# Altium PCB MyPCB1.PcbDoc
Units mm, origin at the board's own origin, x right, y up, seen from the top; angles counter-clockwise.
Board outline 134 x 67 mm, 2 copper layers (Top Layer, Bottom Layer), stack 1.535 mm thick; 50 components, 66 nets, 239 pads, 202 vias.
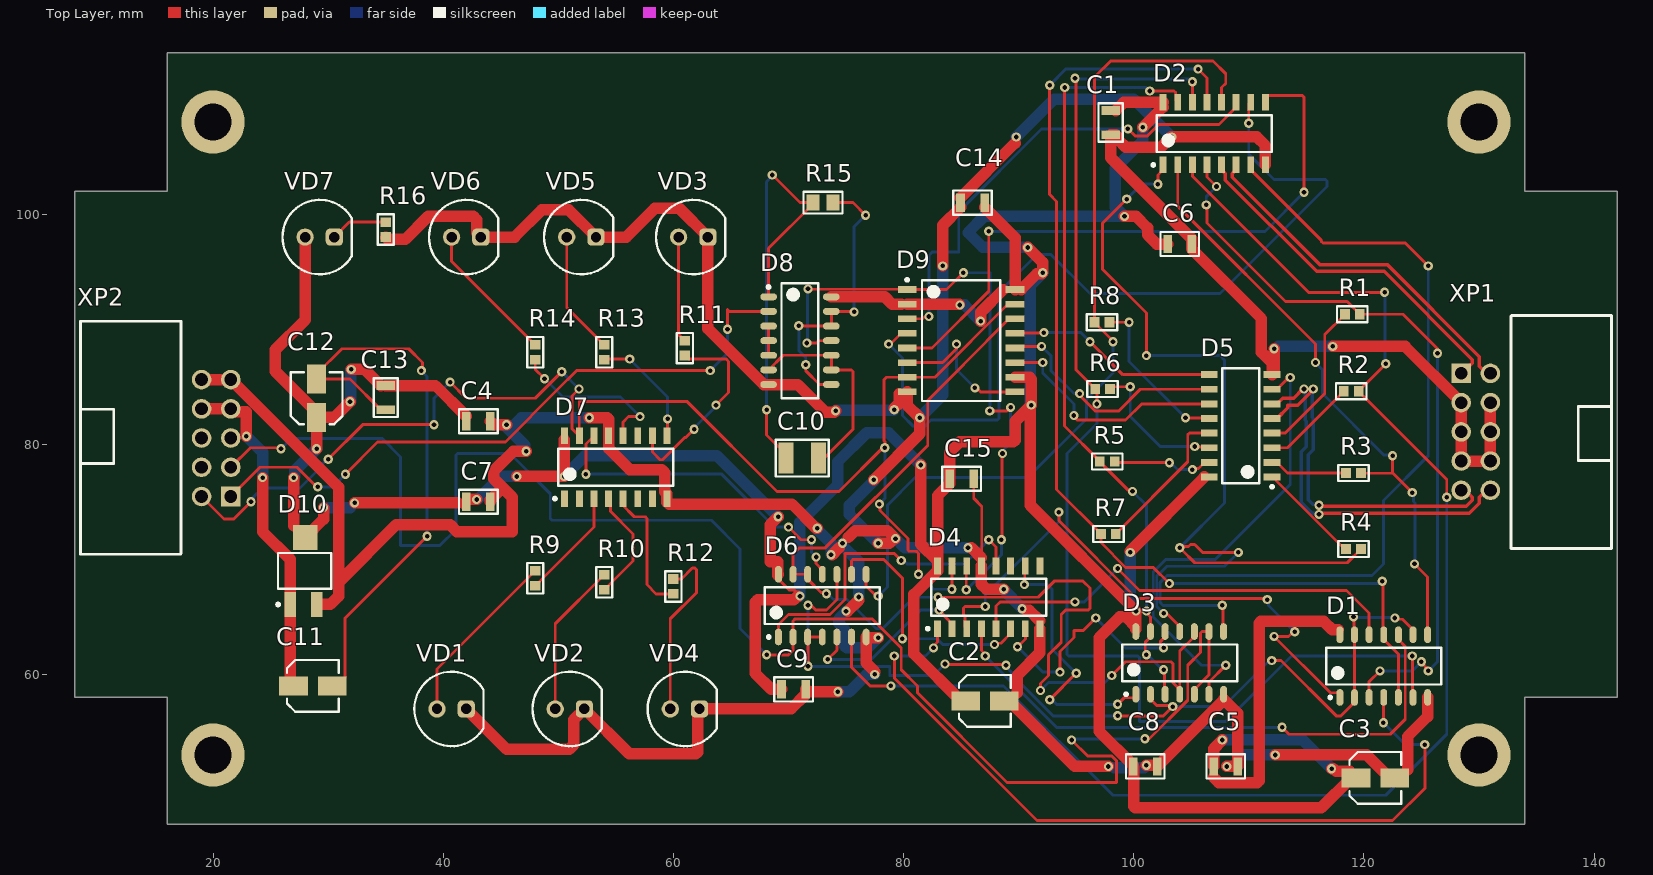
[diagram p0: Top Layer view]
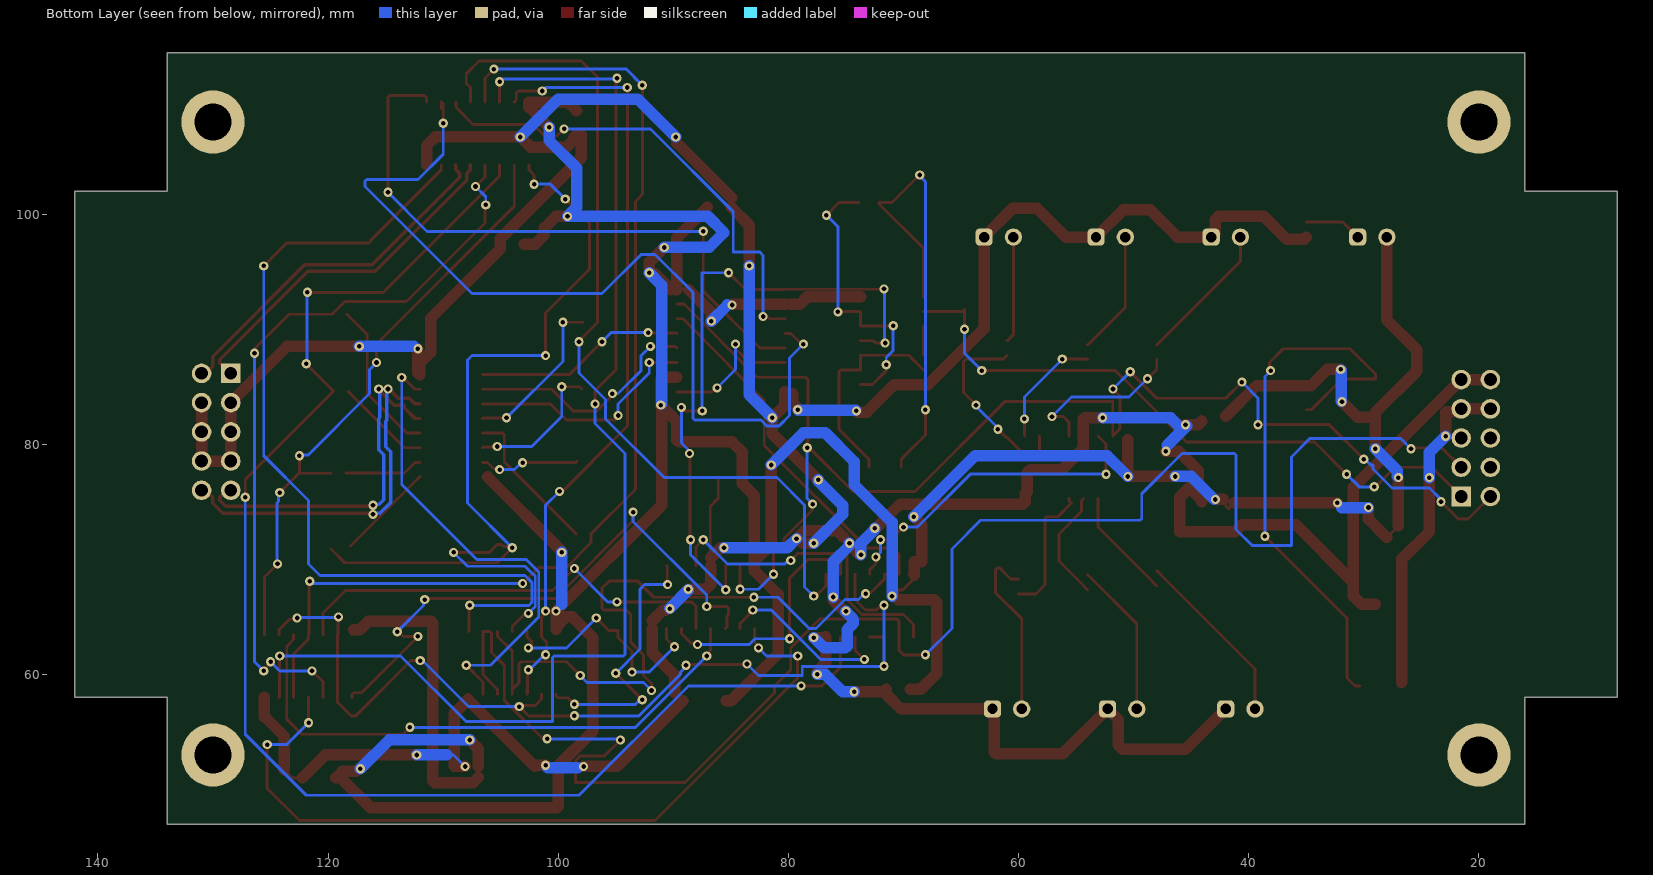
[diagram p1: Bottom Layer view, seen from below]
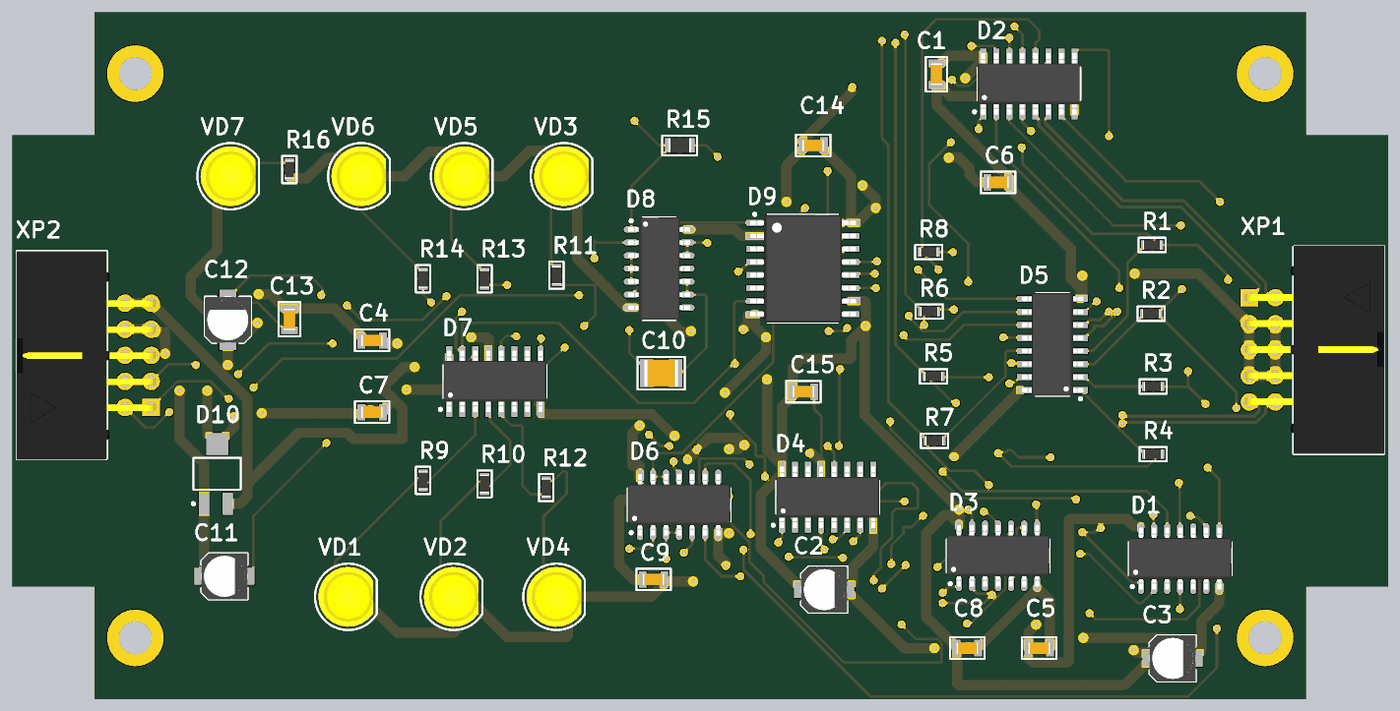
[diagram p2: 3D render of the assembled board from above, using the file's embedded part models]

## Layer stack, top to bottom
Top Solder: solder mask 0.0102, Solder Resist, Dk 3.5
Top Layer: signal copper 0.018
Dielectric 1: core 1.4986, Core-043, Dk 4.3
Bottom Layer: signal copper 0.018
Bottom Solder: solder mask 0.0102, Solder Resist, Dk 3.5

## Board outline
16,47 134,47 134,58 142,58 142,102 134,102 134,114 16,114 16,102 8,102 8,58 16,58

## Design rules (kind name [scope] priority, off if disabled: settings)
Clearance [InNet('No Net')] p1: gap=0.2 ignorepadtopadclearanceinfootprint=FALSE
DiffPairsRouting [All] p1: maxlimit=0.4 minlimit=0.2 mostfreqgap=0.3 toplayer_minwidth=0.2 toplayer_maxwidth=0.381 toplayer_prefwidth=0.3 bottomlayer_minwidth=0.2 bottomlayer_maxwidth=0.381 bottomlayer_prefwidth=0.3 maxuncoupledlength=12.7
PolygonConnect [All] p1: connectstyle=Relief reliefconductorwidth=0.254 reliefentries=4 polygonreliefangle="90 Angle" airgapwidth=0.254
RoutingVias [All] p1: holewidth=0.4 width=0.8 viastyle="Through Hole" minholewidth=0.3 minwidth=0.6 maxholewidth=0.9 maxwidth=1.27
SolderMaskExpansion [All] p1: expansion=0.102
Width [All] p1: maxlimit=1 minlimit=0.2 preferedwidth=0.25
29 further rules are at their usual default settings.

## Classes and differential pairs
net class S[0..5]: S0 S1 S2 S3 S4 S5
net class ABC[0..7]: ABC0 ABC1 ABC2 ABC3 ABC4 ABC5 ABC6 ABC7
component class ivt33_kuznecov_list2_9var: C10 C11 C12 C13 C14 C15 D8 D9 D10 R15 R16 VD7 XP2
component class ivt33_kuznecov_list1_9var: C1 C2 C3 C4 C5 C6 C7 C8 C9 D1 D2 D5 D7 R1 R2 R3 R4 R5 R6 R7 R8 R9 R10 R11 R12 R13 R14 VD1 VD2 VD3 VD4 VD5 VD6 XP1
differential pair Out2: +Out2_P -Out2_N
differential pair Out1: +Out1_P -Out1_N

## Components (designator, comment, footprint, x,y, rotation, side; value= is the part's Value field where it differs from the comment)
C1 "" 0805_N 98,107.95 r90 top
C2 "*" CA010M0010REB-0405 87.075,57.7 r0 top
C3 "*" CA010M0010REB-0405 121,51 r0 top
C4 "" 0805_N 43.05,82 r180 top
C5 "" 0805_N 108,52 r0 top
C6 "" 0805_N 104,97.4 r180 top
C7 "" 0805_N 43.05,75 r180 top
C8 "" 0805_N 101,52 r0 top
C9 "" 0805_N 70.45,58.7 r180 top
C10 "1210" K10-79_3.2_2.5(1210) 71.2,78.8 r0 top
C11 "*" CA010M0010REB-0405 28.675,59 r0 top
C12 "*" CA010M0010REB-0405 29,84 r90 top
C13 "" 0805_N 35,84.05 r90 top
C14 "" 0805_N 86,101 r0 top
C15 "" 0805_N 85.05,77 r180 top
D1 "74AC00SC" SO14-N 121.73,60.725 r90 top
D2 "SOIC-16" SO16-N 107,107 r90 top
D3 "74AC00SC" SO14-N 104,61 r90 top
D4 "SOIC-16" SO16-N 87.4,66.7 r90 top
D5 "SOIC-16" SO16-N 109.3,81.6 r180 top
D6 "74AC00SC" SO14-N 72.94,65.975 r90 top
D7 "SOIC-16" SO16-N 55,78 r90 top
D8 "74AC00SC" SO14-N 71,89 r0 top
D9 "MC14520BDWG \"Motorola\"" SOIC-16W-N 85,89 r0 top
D10 "LM1117DTX" LM1117DTX 29,69 r90 top
R1 "Р1-12-0,1 * 5%-M-\"A\" АЛЯР.434110.005 ТУ" RES_0603_1608_N 119,91.3 r180 top
R2 "Р1-12-0,1 * 5%-M-\"A\" АЛЯР.434110.005 ТУ" RES_0603_1608_N 118.9,84.6 r180 top
R3 "Р1-12-0,1 * 5%-M-\"A\" АЛЯР.434110.005 ТУ" RES_0603_1608_N 119.1,77.5 r180 top
R4 "Р1-12-0,1 * 5%-M-\"A\" АЛЯР.434110.005 ТУ" RES_0603_1608_N 119.1,70.9 r180 top
R5 "Р1-12-0,1 * 5%-M-\"A\" АЛЯР.434110.005 ТУ" RES_0603_1608_N 97.7,78.5 r0 top
R6 "Р1-12-0,1 * 5%-M-\"A\" АЛЯР.434110.005 ТУ" RES_0603_1608_N 97.3,84.8 r0 top
R7 "Р1-12-0,1 * 5%-M-\"A\" АЛЯР.434110.005 ТУ" RES_0603_1608_N 97.8,72.2 r0 top
R8 "Р1-12-0,1 * 5%-M-\"A\" АЛЯР.434110.005 ТУ" RES_0603_1608_N 97.25,90.6 r0 top
R9 "Р1-12-0,1 * 5%-M-\"A\" АЛЯР.434110.005 ТУ" RES_0603_1608_N 48,68.35 r90 top
R10 "Р1-12-0,1 * 5%-M-\"A\" АЛЯР.434110.005 ТУ" RES_0603_1608_N 54,68 r90 top
R11 "Р1-12-0,1 * 5%-M-\"A\" АЛЯР.434110.005 ТУ" RES_0603_1608_N 61,88.35 r90 top
R12 "Р1-12-0,1 * 5%-M-\"A\" АЛЯР.434110.005 ТУ" RES_0603_1608_N 60,67.65 r90 top
R13 "Р1-12-0,1 * 5%-M-\"A\" АЛЯР.434110.005 ТУ" RES_0603_1608_N 54,88 r90 top
R14 "Р1-12-0,1 * 5%-M-\"A\" АЛЯР.434110.005 ТУ" RES_0603_1608_N 48,88 r90 top
R15 "0805" RES_0805_2012_N 73,101 r0 top
R16 "Р1-12-0,1 * 5%-M-\"A\" АЛЯР.434110.005 ТУ" RES_0603_1608_N 35,98.65 r90 top
VD1 "*" LED_5mm 40.73,57 r0 top
VD2 "*" LED_5mm 51,57 r0 top
VD3 "*" LED_5mm 61.73,98 r0 top
VD4 "*" LED_5mm 61,57 r0 top
VD5 "*" LED_5mm 52,98 r0 top
VD6 "*" LED_5mm 42,98 r0 top
VD7 "*" LED_5mm 29.27,98 r0 top
XP1 "TE_1-1634689-0" BH-10R 129.73,81.08 r180 top
XP2 "TE_1-1634689-0" BH-10R 20.27,80.54 r0 top

## Footprints (in the part's own frame and the unit in brackets; to place one, negate y for a bottom-side part, rotate by r counter-clockwise, add the part's x,y. Pads: shape width x height; smd on the part's side, far side on the other; paste and mask are expansions set on the pad)
0805_N [mm] "Резистор, конденсатор"
  rect 0.75x1.6 smd: 1(-1.05,0) 2(1.05,0)
  silkscreen extent -1.68,-1.05 1.68,1.05, body extent -1.05,-0.58 1.05,0.58, height 1
BH-10R [mm] "Разъем угловой 2х5х2,54 типа ВН"
  rect 1.7x1.7 hole 1.1: 1(1.27,-5.08)
  round 1.7 hole 1.1: 2(-1.27,-5.08) 3(1.27,-2.54) 4(-1.27,-2.54) 5(1.27,0) 6(-1.27,0) 7(1.27,2.54) 8(-1.27,2.54) 9(1.27,5.08) 10(-1.27,5.08)
  silkscreen extent -11.8,-10.1 -3.05,10.15, body extent -11.85,-10.2 1.65,10.15, height 9.13
CA010M0010REB-0405 [mm] "Aluminum Electrolytic Capacitor, Body 4,30x4,30x6,30mm, IPC Medium Density"
  rect 2.5x1.65 smd: +(-1.675,0) -(1.675,0)
  silkscreen extent -2.25,-2.25 2.25,2.25, body extent -2.3,-2.25 2.3,2.25, height 6.3
K10-79_3.2_2.5(1210) [mm]
  rect 1.3x2.7 smd: 1(-1.4,0) 2(1.4,0)
  silkscreen extent -2.3,-1.6 2.3,1.6, body extent -1.65,-1.3 1.65,1.3, height 1.75
LED_5mm [mm]
  round 1.5 hole 0.9: A(-1.27,0)
  rrect50% 1.5x1.5 hole 0.9: C(1.27,0)
  silkscreen extent -3.24,-3.24 2.78,3.24, body extent -2.92,-2.92 2.41,2.92, height 10.71
LM1117DTX [mm] "SOT223, 4-Leads, Body 6,50x7,00mm (avg), Pitch 2,30mm, IPC Medium Density"
  rect 2.15x1 smd: 1(-2.925,2.3) 3(-2.925,0)
  rect 2.15x2.15 smd: 4(2.9,1)
  silkscreen extent -3.05,-1.27 1.55,3.47, body extent -1.85,-1.27 1.85,3.35, height 1.8
RES_0603_1608_N [mm] "Chip Resistor, 2-Leads, Body 1,60x0,80mm, IPC Medium Density"
  rect 0.85x0.9 smd: 1(-0.65,0) 2(0.65,0)
  silkscreen extent -1.33,-0.7 1.33,0.7, body extent -0.87,-0.45 0.87,0.45, height 0.55
RES_0805_2012_N [mm] "Rezistor 0805"
  rect 1.15x1.4 smd: 1(-0.875,0) 2(0.875,0)
  silkscreen extent -1.7,-0.95 1.7,0.95, body extent -1.1,-0.7 1.1,0.7, height 0.6
SO14-N [mm]
  oval 1.45x0.6 smd: 1(-2.725,3.81) 2(-2.725,2.54) 3(-2.725,1.27) 4(-2.725,0) 5(-2.725,-1.27) 6(-2.725,-2.54) 7(-2.725,-3.81) 8(2.725,-3.81) 9(2.725,-2.54) 10(2.725,-1.27) 11(2.725,0) 12(2.725,1.27) 13(2.725,2.54) 14(2.725,3.81)
  silkscreen extent -2.85,-5 1.6,5, body extent -3,-5 3,5, height 1.45
SO16-N [mm] "SOIC, 16-Leads, Body 9,90x3,90mm, Pitch 1,27mm, IPC Medium Density"
  rect 1.45x0.6 smd: 1(-2.725,4.445) 2(-2.725,3.175) 3(-2.725,1.905) 4(-2.725,0.635) 5(-2.725,-0.635) 6(-2.725,-1.905) 7(-2.725,-3.175) 8(-2.725,-4.445) 9(2.725,-4.445) 10(2.725,-3.175) 11(2.725,-1.905) 12(2.725,-0.635) 13(2.725,0.635) 14(2.725,1.905) 15(2.725,3.175) 16(2.725,4.445)
  silkscreen extent -2.85,-5 1.6,5.42, body extent -3,-5 3,5, height 1.45
SOIC-16W-N [mm] "SOIC, 16-Leads, Body 10,30x7,50mm, Pitch 1,27mm, IPC Medium Density"
  rect 1.62x0.58 smd: 1(-4.69,4.445) 2(-4.69,3.175) 3(-4.69,1.905) 4(-4.69,0.635) 5(-4.69,-0.635) 6(-4.69,-1.905) 7(-4.69,-3.175) 8(-4.69,-4.445) 9(4.69,-4.445) 10(4.69,-3.175) 11(4.69,-1.905) 12(4.69,-0.635) 13(4.69,0.635) 14(4.69,1.905) 15(4.69,3.175) 16(4.69,4.445)
  silkscreen extent -4.81,-5.25 3.4,5.41, body extent -5.15,-5.25 5.15,5.25, height 2.65

## Part data
C1 C4 C5 C6 C7 C8 C9 C13 C14 C15: library part К10-79_0805_Н90, "Чип конденсатор 0805 Н90 ряд Е6", Case=0805, Manufacturer="ООО \"Кулон\"", Tolerance=+80%-20%, BOM="К10-79-*-B-*+80%-20%-Н90 АЖЯР.673511.004 ТУ", Created_by=Желобаев, Issue_date=19_12_2018, Name=К10-79, Name2="Конденсатор К10-79", TKE=Н90, TU="АЖЯР.673511.004 ТУ", Type=K10-79, Version=0, Weight=0.05
C2 C3 C11 C12: library part CA010M0010REB-0405, "Электролитический SND"
C10: library part К10-79_1210_Н30, "Чип конденсатор 1210 Н30 ряд Е6", Manufacturer="ООО \"Кулон\"", Tolerance=±20%, BOM="Конденсатор К10-79-*-B-*±20%-Н30 АЖЯР.673511.004 ТУ", Datum=19_12_2018, HelpURL=\\papa\Info\Altium_Library\Даташиты_и_ТУ\Конденсаторы_отечественные\К10-79_АЖЯР_673511_004ТУ.pdf, Hight=1.75, LibraryEngeneer=Желобаев, LiveStatus=производится, Name="Конденсатор К10-79", Packing=катушка, Permit MPSU=разрешен, Reliability=0.000005, Size=1210, TKE=Н30, TU="АЖЯР.673511.004 ТУ", Type=K10-79, Version=00, Weight=0.2
D1 D3 D6 D8: "4 элемента 2И-НЕ TTL SOIC-14", Case=SOIC-14, Manufacturer="ON Semiconductor", Power_Voltage="4.5 - 5.5 V", BOM="74AC00SC \"ON Semiconductor\"", Created_by=Желобаев, Issue_date=10.04.2019, Name=74AC00SC, Name2="Микросхема 74AC00SC", Version=0
D2 D5: library part 74HCT151D, "мультиплексор 8 канальный TTL", Manufacturer="NXP Semiconductors", Power_Voltage="4.5 -5.5 V", BOM="74HCT151D \"NXP Semiconductors\"", Case=SOIC-16, Created_by=Желобаев, Issue_date=05.04.2019, Name=74HCT151D, Name2="Микросхема 74HCT151D", Version=0
D4 D7: library part HCF4017BM1, "Декадный счетчик c 10 декодированными выходами", Manufacturer=STMicroelectronics, Power_Voltage="-0.5 -22 V", BOM="HCF4017BM1 \"STMicroelectronics\"", Case=SOIC-16, Created_by=Желобаев, Issue_date=05.04.2019, Name=HCF4017BM1, Name2="Микросхема HCF4017BM1", Version=0
D9: library part MC14520BDWG, "Два двоичных счетчика", Case=SOIC-16, Manufacturer=Motorola, BOM="MC14520BDWG \"Motorola\"", Created_by=Желобаев, Issue_date=6.01.2019, Name=MC14520BDWG, Name2="Микросхема MC14520BDWG", Version=0
R1 R2 R3 R4 R5 R6 R7 R8 R9 R10 R11 R12 R13 R14 R16: library part Р1-12-0,1-5%, "Резистор от 0,75 Ом до 10 МОм", Case=0603, Manufacturer="ОАО \"НПО \"Эркон\"", Tolerance=5%, Voltage=50, BOM="Р1-12-0,1 * 5%-M-\"A\" АЛЯР.434110.005 ТУ", Created_by=Желобаев, Issue_date=10.04.2019, Name=Р1-12-0,1, Name2="Резистор Р1-12-0,1", Size=0603, TKR=M, TU="АЛЯР.434110.005 ТУ", Type="Р1-12-0,1±5%-М-\"А\"", Version=00, Weight=0,005
R15: library part Р1-12-0,125-5%, "Резистор от 0,75 Ом до 2 МОм", Manufacturer="ОАО \"НПО \"Эркон\"", Tolerance=5%, Voltage=150, BOM="Р1-12-0,125 * 5%-M-\"A\" АЛЯР.434110.005 ТУ", Case=0805, Created_by=Желобаев, Issue_date=05_12_2018, Name=Р1-12-0,125, Name2="Резистор Р1-12-0,125", Size=0805, TKR=M, TU="АЛЯР.434110.005 ТУ", Type="Р1-12-0,125±5%-М-\"А\"", Version=00, Weight=0,01
VD1 VD2 VD3 VD4 VD5 VD6 VD7: library part 521-9466, "Светодиод,5мм,жёлтый", Manufacture=Dialight, BOM="521-9466 \"Dialight\"", Name=521-9466
XP1 XP2: "Вилка типа BH-10R угловая правая двухрядная 2х5х2.54", Case=BH-10R, Manufacturer="TE Connectivity", BOM="TE_1-1634689-0 \"TE Connectivity\"", Created_by=Желобаев, Issue_date=13.05.2019, Name=TE_1-1634689-0, Name2="Вилка угловая TE_1-1634689-0", Version=0

## Free pads (board coordinates)
  round 5.5 hole 3.2: M1(20,108) M2(130,108) M3(130,53) M4(20,53)

## Via types
v1: diameter 0.8, hole 0.4, Top Layer to Bottom Layer, 202 vias

## Nets (pads, with @x,y where several pads share a name; then routed paths per layer and width w, separated by ;. In a path a pad name is that pad's centre, name@x,y a point inside that pad or via, vN(x,y) a via of type N, cw(c..) or ccw(c..) an arc to the next point about the centre after c; other vN are vias at no path point)
+5V: C1.2 C2.+ C3.+ C4.2 C5.1 C6.2 C7.2 C8.1 C9.2 C12.+ C13.2 C14.2 C15.2 D1.14 D2.16 D3.14 D4.16 D5.16 D6.14 D7.16 D8.14 D9.2 D9.10 D9.16 D10.4 VD7.A | length 398
  Top Layer w0.25: D10.4@27,72.9 D10.4 ; C13.2@34.575,85.1 C13.2 ; 41.25,74.9 41.75,74.4 42,74.65 C7.2 C7.2@42.2,75.2 ; C4.2 C4.2@42,82.425 ; D6.14 69.13,68.275 70.057,67.348 70.452,67.348 v1(71,66.8) ; D9.2@79.79,92.175 D9.2 ; C14.2@87.05,100.575 C14.2 ; 88.679,93.445 D9.16 D9.16@90.21,93.445 ; v1@91.995,94.795 v1(92.1,94.9) v1@92.076,94.924 ; C1.2 C1.2@98.425,109 ; v1(99.7,70.6) v1@99.7,70.705 ; D2.16@102.555,109.3 D2.16 ; D5.16@106.15,77.155 D5.16 ; 106.95,51.05 C5.1 ; 110.754,50.6 110.9,50.746 ; 110.9,64.454 111.046,64.6 ; D1.14@117.758,63.878 117.92,63.717 D1.14
  Top Layer w1: D10.4@27,72.9 v1(27,77.1) ; D10.4 29.6,73.5 v1(29.6,74.5) ; VD7.A 28,90.8 25.4,88.2 25.4,86.35 29,82.75 C12.+ ; v1(29,79.6) C12.+ ; v1(31.9,83.7) 30.525,82.325 C12.+ ; v1(32,86.5) 33.175,86.5 C13.2@34.575,85.1 ; v1(32.3,74.9) 41.25,74.9 ; C13.2 39.325,85.1 C4.2@42,82.425 ; C7.2@42.2,75.2 v1(42.9,75.2) ; v1(46.4,77.2) v1(50.5,77.2) D7.16@50.5,80.38 ; v1(69.1,73.7) 68.4,73 68.4,69.8 69.063,69.8 69.063,68.633 D6.14 ; C9.2 68.5,58.7 67.1,60.1 67.1,66.254 67.323,66.477 70.477,66.477 v1@70.8,66.8 ; D8.14 78.365,92.81 79,92.175 D9.2@79.79,92.175 ; D9.2 v1@84.825,92.175 ; v1(81.5,78.2) 81.5,71.305 D4.16@82.955,69.85 ; C2.+ 84.975,57.7 80.9,61.775 80.9,66.945 82.955,69 D4.16 D4.16@82.955,69.85 ; v1(86.7,90.7) 86.7,91.466 88.679,93.445 ; C14.2@87.05,100.575 89.69,97.935 D9.16 ; D9.10 89.702,85.813 90.954,85.813 91.1,85.666 v1(91.1,83.4) v1@91,83.3 ; D9.16@90.21,93.445 91.56,94.795 v1@91.995,94.795 ; v1(90.8,97.1) 92.076,95.824 v1@92.076,94.924 ; C1.2@98.425,109 99.15,109.725 D2.16 ; v1(99.2,99.8) 100.2,99.8 101.203,98.797 101.203,98.197 102,97.4 C6.2 ; v1@99.7,70.705 D5.16@106.15,77.155 ; D3.14@100.19,64.15 99.344,64.996 98.796,64.996 97,63.2 97,55.046 99.95,52.096 C8.1 100,51.95 100,48.546 100.146,48.4 116.3,48.4 118.9,51 C3.+ 118.761,51.564 117.585,51.564 117.349,51.8 v1(117.2,51.8) ; D3.14@100.195,63.942 100.195,65.495 v1(100.2,65.5) 91,74.7 v1@91,83.3 ; v1(100.8,107.545) D2.16@102.555,109.3 ; 106.95,51.05 107.4,50.6 110.754,50.6 ; C5.1 106.95,53.55 v1(107.7,54.3) ; 110.9,50.746 110.9,64.454 ; 111.046,64.6 116.523,64.6 117.245,63.878 D1.14@117.758,63.878 ; D4.16@82.955,69.85 82.955,75.53 84,76.575 C15.2 84,79.3 84.9,80.2 89.554,80.2 89.7,80.346 89.7,82 v1@91,83.3
  Bottom Layer w0.25: v1(27,77.1) v1@27.105,77.205 ; 31.9,74.5 v1(32.3,74.9) ; v1(31.9,83.7) v1@31.95,83.75 ; v1@31.95,86.45 v1(32,86.5) ; v1(42.9,75.2) v1@43,75.2 ; v1@91,83.5 v1(91.1,83.4) ; 99.7,66.096 100.2,65.596 v1(100.2,65.5)
  Bottom Layer w1: v1@27.105,77.205 27.105,77.705 v1(29,79.6) ; v1(29.6,74.5) 31.9,74.5 ; v1@31.95,83.75 v1@31.95,86.45 ; v1@43,75.2 45,77.2 v1(46.4,77.2) ; v1(50.5,77.2) 52.312,79.012 63.788,79.012 v1(69.1,73.7) ; v1(71,66.8) 71,73.2 74.3,76.5 74.3,78.5 76.8,81 78.7,81 v1(81.5,78.2) ; v1@85.3,92.1 v1(86.7,90.7) ; v1(90.8,97.1) 86.9,97.1 85.604,98.396 87.007,99.8 v1(99.2,99.8) 98.4,100.6 98.4,104 100.8,106.4 v1(100.8,107.545) ; v1@91,83.5 91,93.8 v1(92.1,94.9) ; 99.7,66.096 v1(99.7,70.6) ; v1(107.7,54.3) 114.7,54.3 v1(117.2,51.8)
  other v1: 84.9,92.1
+9V: C11.+ D10.1 XP2.7 XP2.8 | length 29.5
  Top Layer w0.25: XP2.7 XP2.7@21.817,82.803 ; C11.+@26.7,59.3 C11.+
  Top Layer w1: XP2.8 XP2.7 ; XP2.7@21.817,82.803 22.897,82.803 22.9,82.8 v1(22.9,80.7) ; v1(24.3,77.1) 24.3,72.4 26.7,70 D10.1 C11.+@26.7,59.3
  Bottom Layer w1: v1(22.9,80.7) 24.3,79.3 v1(24.3,77.1)
ABC0: D1.3 D2.4 R1.1 | length 66.4
  Top Layer w0.25: v1(106.3,100.8) 106.365,100.735 106.365,99.235 113.2,92.4 118.55,92.4 119.325,91.625 119.35,91.625 119.65,91.325 R1.1 123.4,91.3 126.4,88.3 v1(126.4,87.9) ; D2.4 106.365,103.235 v1(107.2,102.4) ; D1.3 120.46,59.36 v1(121.4,60.3) ; v1(125,61.1) 125,61 125.6,60.4 v1(125.6,60.3)
  Bottom Layer w0.25: v1(106.3,100.8) 106.3,101.5 v1(107.2,102.4) ; v1(121.4,60.3) 124.2,60.3 v1(125,61.1) ; v1(125.6,60.3) 126.4,61.1 v1(126.4,87.9)
ABC1: D2.3 D6.6 R2.1 | length 125.6
  Top Layer w0.25: D6.6 75.48,60.62 77.1,59 v1(78.9,59) ; D2.3 105.095,103.305 115.2,93.2 v1(121.8,93.2) ; v1(121.9,87) 121.9,86.975 119.55,84.625 R2.1 119.55,84.575 127.2,76.925 v1(127.2,75.4)
  Bottom Layer w0.25: v1(78.9,59) 88.7,59 98.2,49.5 121.9,49.5 127.2,54.8 v1(127.2,75.4) ; v1(121.8,93.2) 121.85,93.15 121.85,87.05 v1(121.9,87)
ABC2: D1.8 D2.2 R3.1 | length 53
  Top Layer w0.25: D2.2 103.825,100.675 115.8,88.7 v1(115.8,87.1) ; R3.1 119.77,77.48 122.52,77.48 v1(124.2,75.8) ; 122.5,77.505 v1(122.5,79) ; v1(124.4,69.6) 125.54,68.46 D1.8
  Bottom Layer w0.25: v1(115.8,87.1) 115.8,87.079 116.4,86.479 116.4,84.4 121.725,79.075 122.425,79.075 v1(122.5,79) ; v1(124.2,75.8) 124.305,75.695 124.305,75.045 124.45,74.9 124.45,69.65 v1(124.4,69.6)
ABC3: D2.1 D3.11 R4.1 | length 82.1
  Top Layer w0.25: v1(99.4,101.3) 97.3,99.2 97.3,95.2 101.1,91.4 v1(101.1,87.7) ; v1(102.1,102.6) 102.1,103.395 102.555,103.85 D2.1 ; v1(102.6,65.3) 102.705,65.195 102.955,65.195 104,64.15 D3.11 ; v1(109.1,70.6) 106,70.6 105.3,71.3 104.949,71.3 104.754,71.105 104.105,71.105 v1(104,71) 104.156,70.844 105.3,69.7 118.55,69.7 R4.1
  Bottom Layer w0.25: v1(99.4,101.3) 100.7,102.6 v1(102.1,102.6) ; v1(101.1,87.7) 107.5,87.7 107.9,87.3 107.9,74.9 v1(104,71) ; v1(102.6,65.3) 102,65.9 102,68.554 102.146,68.7 102.2,68.7 102.9,69.4 107.9,69.4 v1(109.1,70.6)
ABC4: D2.15 D3.3 D3.13 R5.1 | length 68.2
  Top Layer w0.25: v1(94,111) 94,81.575 97.05,78.525 R5.1 97.05,78.475 99.52,76.005 99.795,76.005 v1(99.9,75.9) ; v1(101.1,61.7) 101.005,61.795 101.005,62.8 101.46,63.255 D3.13 101.46,64.991 101.1,65.351 v1(101.1,65.5) ; v1(101.4,110.7) 103.5,110.7 103.65,110.55 103.65,109.9 D2.15 ; v1(102.6,60.4) 102.665,60.335 102.665,58.34 D3.3 D3.3@102.73,58.7
  Bottom Layer w0.25: v1(94,111) 101.1,111 v1(101.4,110.7) ; v1(99.9,75.9) 101.1,74.7 v1(101.1,65.5) ; v1(101.1,61.7) 101.2,61.7 102.5,60.4 v1(102.6,60.4)
ABC5: D1.6 D2.14 R6.1 | length 105.7
  Top Layer w0.25: v1(94.9,111.8) 95,111.7 95,86.475 96.65,84.825 R6.1 96.8,84.65 v1(96.8,83.5) ; D2.14 105.097,109.727 v1(105.097,111.497) ; v1(124.2,61.6) 124.235,61.565 124.235,58.035 D1.6
  Bottom Layer w0.25: v1(94.9,111.8) 94.95,111.75 104.845,111.75 v1(105.097,111.497) ; v1(96.8,83.5) 96.8,81.8 94.2,79.2 94.2,61.746 94.346,61.6 100.354,61.6 100.5,61.454 100.5,55.9 108,55.9 113.7,61.6 v1(124.2,61.6)
ABC6: D1.5 D1.11 D2.13 R7.1 | length 94.9
  Top Layer w0.25: v1(92.7,111.2) 92.7,101.7 93.3,101.1 93.3,92.8 93.3,76.075 97.15,72.225 R7.1 97.15,71.45 99.3,69.3 101.7,69.3 v1(103.1,67.9) ; v1(105.6,112.6) 106.365,111.835 D2.13 ; v1(121.6,68.1) 121.665,68.035 121.665,63.515 D1.11 121.73,63.025 123,61.755 D1.5
  Bottom Layer w0.25: v1(92.7,111.2) 94.1,112.6 v1(105.6,112.6) ; v1(103.1,67.9) 121.251,67.9 121.451,68.1 v1(121.6,68.1)
ABC7: D2.12 D6.8 R8.1 | length 77.5
  Top Layer w0.25: D6.8 76.75,67.674 77.624,66.8 v1(77.8,66.8) ; v1(98.2,88.9) 98.2,88.975 96.6,90.575 R8.1 96.6,111.9 98,113.3 106.9,113.3 108,112.2 108,111.358 107.635,110.993 D2.12
  Bottom Layer w0.25: v1(77.8,66.8) 78.6,67.6 78.6,74.7 81,77.1 90.8,77.1 95.9,82.2 95.9,83.9 98.2,86.2 v1(98.2,88.9)
GND: C1.1 C2.- C3.- C4.1 C5.2 C6.1 C7.1 C8.2 C9.1 C14.1 C15.1 D1.7 D2.8 D3.7 D4.8 D4.13 D5.8 D6.7 D7.8 D7.13 D8.7 D9.8 D10.3 R16.1 VD1.C VD2.C VD3.C VD4.C VD5.C VD6.C XP1.3 XP1.4 XP1.5 XP1.6 XP1.7 XP1.8 XP2.9 XP2.10 | length 461
  Top Layer w0.25: C4.1@43.888,82.213 C4.1@44.113,82.438 ; C4.1 44.1,81.75 C4.1@44.35,81.5 ; v1(73.7,70.4) v1@73.8,70.4 ; v1(75,65.5) v1@75.149,65.5 ; 75.203,71.57 75.203,71.903 ; v1@76.1,66.451 v1(76.1,66.726) ; D6.7 D6.7@76.8,63.2 ; v1(77.5,60) v1@77.5,60.249 ; v1@79.151,71.8 v1(79.3,71.8) ; v1(79.2,83) v1@79.2,83.149 ; D9.8@79.625,84.39 79.79,84.555 D9.8 ; C14.1@84.95,100.575 C14.1 C14.1@84.95,101.425 ; v1(85.6,71) v1@85.9,71 ; C15.1 86.1,75.3 86.8,74.6 86.8,69.46 D4.13 D4.13@86.765,70.135 ; C2.- 89.175,57.7 C2.-@89.875,58.4 ; 89.695,106.17 89.695,106.595 v1(89.8,106.7) ; D4.8 D4.8@91.845,64.655 ; C8.2@101.95,52.1 C8.2 ; D3.7@107.648,57.598 107.648,57.783 D3.7@107.81,57.945 ; D3.7@107.81,57.85 D3.7@107.81,57.945 ; D3.7 D3.7@107.81,57.945 ; C3.-@122.25,51 C3.- 123.1,51 C3.-@123.8,51.7
  Top Layer w1: XP2.10 XP2.9 30.9,76.26 30.9,68.1 ; D10.3 30.175,66.075 30.9,66.8 30.9,68.1 ; R16.1 35.2,97.8 36.7,97.8 38.7,99.8 42.6,99.8 42.9,99.5 42.9,98.37 VD6.C 46.2,98 48.581,100.381 50.889,100.381 VD5.C 55.9,98 58.4,100.5 60.5,100.5 VD3.C 63,90.04 67.85,85.19 D8.7 70.81,85.19 73.2,82.8 74,82.8 v1(74.1,82.9) ; VD1.C 45.5,53.5 50.954,53.5 51.343,53.889 51.343,56.073 VD2.C 56.17,53.1 61.954,53.1 62.1,53.246 62.1,56.83 VD4.C 70.225,57 71.5,58.275 C9.1 71.7,58.5 v1(74.3,58.5) ; C7.1 44.1,75.175 45,76.075 45,76.4 ; C4.1 44.4,81.7 v1(45.5,81.7) ; v1(47.2,79.4) 46.1,79.4 44.4,77.7 44.4,77 45,76.4 ; v1(52.7,82.3) 54.254,82.3 54.4,82.154 54.4,80.76 D7.13 54.375,80.715 54.375,79.625 56.2,77.8 59,77.8 59.27,77.53 59.27,75.875 59.445,75.7 D7.8 59.445,74.975 59.62,74.8 70.3,74.8 72.4,72.7 v1(72.5,72.7) ; v1@73.8,70.4 74.4,71 ; v1@75.149,65.5 v1@76.1,66.451 ; 75.203,71.903 75.8,72.5 78.6,72.5 v1(79.3,71.8) ; D6.7 76.75,60.999 v1@77.5,60.249 ; D6.7@76.8,63.2 v1(77.8,63.2) ; v1(77.4,76.9) 81.4,80.9 v1(81.4,82.3) 80.31,83.39 D9.8 ; v1(77.8,71.4) 78.751,71.4 v1@79.151,71.8 ; v1@79.2,83.149 79.625,83.574 D9.8@79.625,84.39 ; v1(83.4,95.5) 83.4,99.025 C14.1@84.95,100.575 ; C14.1@84.95,101.425 89.695,106.17 ; v1@85.9,71 D4.13@86.765,70.135 ; D4.13 86.765,67.835 87.2,67.4 v1(88.7,67.4) ; C2.-@89.175,57.7 94.875,52 v1(97.8,52) ; C2.-@89.875,58.4 89.875,59.903 91.845,61.873 D4.8 ; v1@90.65,65.595 90.905,65.595 D4.8@91.845,64.655 ; v1(101.1,52.1) C8.2@101.95,52.1 ; C8.2 D3.7@107.648,57.598 ; D3.7@107.81,57.85 109.05,56.61 C5.2 v1(108.1,52) ; D2.8 111.445,105.955 110.7,106.7 v1(103.3,106.7) 103.279,106.7 102.379,105.8 99.321,105.8 98.675,106.446 98.675,106.65 98.425,106.9 C1.1 98,104.9 105.05,97.85 C6.1 105.05,96.975 111.1,90.925 111.1,88 112.025,87.075 D5.8 112.2,86.22 v1(112.2,88.3) ; v1(112.3,53) 120.25,53 C3.-@122.25,51 ; v1(117.3,88.5) 123.58,88.5 XP1.3 XP1.5 XP1.7 XP1.8 XP1.6 XP1.4 ; C3.-@123.8,51.7 123.8,54.6 125.54,56.34 D1.7 ; 30.9,68.1 31,68.1 35.9,73 40.6,73 41.196,72.404 46,72.404 46,75.4 45,76.4
  Bottom Layer w0.25: v1(45.5,81.7) 46.2,81.7 ; 47.095,79.905 47.095,79.505 v1(47.2,79.4) ; v1(74.1,82.9) v1@74.15,82.95 ; v1@79.15,82.95 v1(79.2,83) ; v1@88.7,67.35 v1(88.7,67.4) ; v1(90.3,65.7) v1@90.3,65.75 ; v1(97.8,52) 97.9,51.9 98.3,51.9 ; v1@100.9,51.9 v1(101.1,52.1) ; v1(108.1,52) 109.1,53 109.7,53
  Bottom Layer w1: v1@45.4,81.6 47.095,79.905 ; 46.2,81.7 46.8,82.3 v1(52.7,82.3) ; v1(72.5,72.7) 72.5,72.6 73.7,71.4 v1(73.7,70.4) ; v1@74.15,82.95 v1@79.15,82.95 ; v1(74.3,58.5) 75.3,58.5 76.8,60 v1(77.5,60) ; v1(74.7,71.4) 74.7,71.2 76.1,69.8 v1(76.1,66.726) ; v1(75,65.5) 75,65.438 74.395,64.832 74.395,64.695 74.375,64.675 74.375,64.425 74.9,63.9 74.9,62.446 75.046,62.3 76.9,62.3 v1(77.8,63.2) ; v1(77.4,76.9) 77.4,76.8 75.3,74.7 75.3,73.9 v1(77.8,71.4) ; v1(79.3,71.8) 80.1,71 v1(85.6,71) ; v1(81.4,82.3) 83.4,84.3 v1(83.4,95.5) ; v1@88.7,67.35 v1@90.3,65.75 ; v1(89.8,106.7) 93.1,110 100,110 v1(103.3,106.7) ; 98.3,51.9 v1@100.9,51.9 ; 109.7,53 v1(112.3,53) ; 112.549,88.5 v1(117.3,88.5)
NetC10_1: C10.1 D8.1 R15.1 | length 40.8
  Top Layer w0.25: v1(68.1,83) 68.1,80.8 69.6,79.3 70.2,78.7 C10.1@70.2,78 ; D8.1 68.275,97.025 72.125,100.875 R15.1 71,101 v1(68.6,103.4)
  Bottom Layer w0.25: v1(68.1,83) 68.1,102.804 68.6,103.304 v1(68.6,103.4)
NetC10_2: C10.2 D8.6 D8.9 D8.10 | length 18.6
  Top Layer w0.25: D8.6 69.545,87.73 D8.10 D8.9 75.454,86.46 75.6,86.314 75.6,81.3 73,78.7 C10.2@73,78
NetC11_-: C11.- C12.- C13.1 | length 50.2
  Top Layer w0.25: C11.- 30.775,59 31.475,59.7 31.475,64.875 v1(38.6,72) ; C13.1 34.575,83 31.9,85.675 C12.- 29,86.1 31.2,88.3 37,88.3 38.196,87.104 38.196,86.496 v1(38.1,86.4)
  Bottom Layer w0.25: v1(38.1,86.4) 38.6,85.9 v1(38.6,72)
NetD1_2: D1.2 D1.9 D1.13 D3.2 D6.3 D6.4 D6.10 | length 85.7
  Top Layer w0.25: v1(71.7,60.7) 71.7,63.22 D6.3 D6.4 ; v1(71.7,66) 71.974,66 72.374,65.6 73.3,65.6 74.21,66.51 D6.10 ; v1(83.6,60.9) 83.65,60.85 88.85,60.85 v1(88.9,60.8) ; v1(98.6,56.4) 102.6,56.4 v1(103.4,57.2) 103.295,57.305 102.005,57.305 101.46,57.85 D3.2 ; v1(112,61.2) 112.8,61.2 117.6,56.4 118.015,56.4 119.19,57.575 D1.2 D1.13 119.145,63.495 119.145,64.955 v1(119.1,65) ; v1(122.7,64.9) 122.805,64.795 123.35,64.795 124.27,63.875 D1.9
  Bottom Layer w0.25: v1(71.7,66) v1(71.7,60.7) 78.8,60.7 78.8,59.9 82.6,59.9 v1(83.6,60.9) ; v1(88.9,60.8) 88.9,60.677 89.386,60.19 89.386,60.014 93,56.4 v1(98.6,56.4) ; v1(103.4,57.2) 107.8,57.2 111.8,61.2 v1(112,61.2) ; v1(119.1,65) 119.15,64.95 122.65,64.95 v1(122.7,64.9)
NetD2_7: D2.7 D3.8 | length 76.5
  Top Layer w0.25: v1(107.7,66) 107.755,65.945 107.755,63.78 D3.8 ; D2.7 110.175,103.85 116.3,97.725 116.3,97.646 116.446,97.5 123.6,97.5 v1(125.6,95.5)
  Bottom Layer w0.25: v1(107.7,66) 102.546,66 102.3,66.246 102.3,68 102.9,68.6 120.7,68.6 121.7,69.6 121.7,75.1 125.6,79 v1(125.6,95.5)
NetD3_4: D3.4 D3.10 D6.12 D6.13 D9.14 | length 94.7
  Top Layer w0.25: v1(73.3,67) 73.195,67.105 72.84,67.105 71.67,68.275 D6.12 D6.13 70.4,70.454 70.946,71 73.2,71 82.1,79.9 82.1,83.8 85.2,86.9 85.2,86.935 89.17,90.905 D9.14 ; v1(83,66.7) 91.7,66.7 93.1,68.1 95.6,68.1 96.2,67.5 96.2,65.746 96.054,65.6 94.1,65.6 93.7,65.2 93.7,62.8 92.6,61.7 92.6,59.9 91.9,59.2 v1(91.9,58.6) ; v1(98.1,59.9) 99.3,61.1 103.254,61.1 103.4,60.954 103.4,59.3 D3.4@104,58.7 ; D3.4 D3.4@104,58.7 ; D3.10 105.27,63.3 104,62.03 D3.4@104,58.7
  Bottom Layer w0.25: v1(73.3,67) 73.423,67 73.91,66.514 75.086,66.514 77.6,64 78.2,64 80.9,66.7 v1(83,66.7) ; v1(91.9,58.6) 92.6,59.3 97.5,59.3 v1(98.1,59.9)
NetD3_5: D3.5 D3.9 D6.2 XP2.3 | length 147.3
  Top Layer w0.25: XP2.3 23.24,79.7 25.8,79.7 v1(25.9,79.6) ; v1(68.1,61.7) 70,61.7 70.4,62.1 D6.2 70.4,64.654 70.546,64.8 77.3,64.8 79.8,62.3 79.8,60.4 81.2,59 81.2,58.4 89,50.6 98.5,50.6 98.5,52.5 98.1,52.9 96,52.9 v1(94.6,54.3) ; v1(100.971,54.4) 101.342,54.4 104.7,57.758 104.7,60.8 105.8,61.9 105.8,63.579 105.946,63.725 D3.9 106.54,59.97 105.27,58.7 D3.5
  Bottom Layer w0.25: v1(25.9,79.6) 26.8,80.5 34.7,80.5 36.3,78.9 36.3,71.2 39.7,71.2 41.1,72.6 41.1,79.054 41.246,79.2 45.8,79.2 49.3,75.7 49.3,73.546 49.446,73.4 63.3,73.4 65.8,70.9 65.8,64 v1(68.1,61.7) ; v1(94.6,54.3) 94.7,54.4 v1(100.971,54.4)
NetD3_6: D3.6 D5.7 | length 41.4
  Top Layer w0.25: D3.6 106.54,59.34 v1(108,60.8) ; D5.7 112.45,84.775 113.475,85.8 v1(113.6,85.8)
  Bottom Layer w0.25: v1(108,60.8) 105.9,60.8 101.7,65 101.7,68.9 102.8,70 107.1,70 113.6,76.5 v1(113.6,85.8)
NetD4_12: D4.12 D6.1 | length 28
  Top Layer w0.25: D6.1 69.13,64.33 70,65.2 73.6,65.2 74.9,66.5 74.9,70.5 79.2,70.5 v1(79.8,69.9) ; v1(87.4,71.7) 88.035,71.065 D4.12
  Bottom Layer w0.25: v1(79.8,69.9) 80.021,69.9 80.321,69.6 85.3,69.6 v1(87.4,71.7)
NetD4_14: D4.14 D8.11 D9.1 | length 56.8
  Top Layer w0.25: v1(71.6,88.8) 72.43,88.8 72.625,88.995 73.72,88.995 D8.11 ; v1(71.7,93.5) 71.727,93.473 80.282,93.473 D9.1 83.745,93.445 v1(85.2,94.9) ; v1(85.447,67.348) 85.447,69.377 D4.14 ; v1(87.5,82.9) 89,82.9 v1(89.3,83.2) ; v1(88.5,71.7) 88.55,71.75 88.55,79.15 v1(88.6,79.2)
  Bottom Layer w0.25: v1(71.6,88.8) 71.65,88.85 71.65,93.45 v1(71.7,93.5) ; v1(85.2,94.9) 87.5,94.9 v1(87.5,82.9) ; v1(85.447,67.348) 88.5,70.4 v1(88.5,71.7) ; v1(88.6,79.2) 88.6,79.4 89.3,80.1 v1(89.3,83.2)
NetD5_1: D5.1 R4.2 | length 8.5
  Top Layer w0.25: D5.1 112.025,77.184 R4.2@118.048,71.161
NetD5_2: D5.2 R3.2 | length 6.8
  Top Layer w0.25: D5.2 112.45,78.425 113.375,77.5 R3.2
NetD5_3: D5.3 R2.2 | length 8.3
  Top Layer w0.25: D5.3 113.37,79.695 118.25,84.575 R2.2
NetD5_4: D5.4 R1.2 | length 13.6
  Top Layer w0.25: D5.4 113.165,80.965 116.6,84.4 116.6,89.525 118.35,91.275 R1.2
NetD5_12: D5.12 R8.2 | length 14.1
  Top Layer w0.25: R8.2 v1(99.6,90.6) ; v1(104.5,82.3) 104.533,82.267 106.543,82.267 D5.12
  Bottom Layer w0.25: v1(99.6,90.6) 99.6,87.2 v1(104.5,82.3)
NetD5_13: D5.13 R7.2 | length 13.1
  Top Layer w0.25: R7.2 98.45,72.225 104.7,78.475 104.7,80.819 104.846,80.965 D5.13
NetD5_14: D5.14 R6.2 | length 12.4
  Top Layer w0.25: R6.2 98.15,85 v1(99.7,85) ; v1(105.3,79.8) 105.352,79.748 106.522,79.748 D5.14
  Bottom Layer w0.25: v1(99.7,85) 99.7,82.4 102.3,79.8 v1(105.3,79.8)
NetD5_15: D5.15 R5.2 | length 8.8
  Top Layer w0.25: R5.2 98.45,78.4 v1(103.1,78.4) ; v1(105.1,77.8) 105.205,77.905 105.63,77.905 106.15,78.425 D5.15
  Bottom Layer w0.25: v1(103.1,78.4) 103.206,78.4 103.806,77.8 v1(105.1,77.8)
NetD6_11: D6.11 D7.14 | length 29
  Top Layer w0.25: v1(52.4,77.4) 52.4,80.03 D7.14 ; v1(70,72.8) 71.1,71.7 v1(72,71.7) ; v1(72.4,70.2) 72.4,69.632 72.94,69.092 D6.11
  Bottom Layer w0.25: v1(52.4,77.4) 64.2,77.4 68.8,72.8 v1(70,72.8) ; v1(72,71.7) 72,70.6 v1(72.4,70.2)
NetD7_3: D7.3 R9.1 | length 9.7
  Top Layer w0.25: R9.1 48.025,67.7 48.325,68 48.325,68.025 53.095,72.795 D7.3
NetD7_4: D7.4 R10.1 | length 9.9
  Top Layer w0.25: R10.1 54.025,67.35 54.325,67.65 54.325,67.675 56.5,69.85 56.5,72.2 54.525,74.175 54.525,75.115 D7.4
NetD7_5: D7.5 R12.1 | length 11.7
  Top Layer w0.25: D7.5 55.635,75.071 55.46,74.896 55.404,74.896 55.543,74.757 56.6,73.7 57.554,73.7 57.7,73.554 57.7,67.8 58.5,67 R12.1
NetD7_9: D7.9 R13.1 | length 10.3
  Top Layer w0.25: R13.1@54.025,87.35 R13.1 54.05,87.4 v1(56.2,87.4) ; D7.9 59.472,80.752 59.472,82.173 v1(59.5,82.2)
  Bottom Layer w0.25: v1(56.2,87.4) 59.5,84.1 v1(59.5,82.2)
NetD7_10: D7.10 R11.1 | length 17.5
  Top Layer w0.25: D7.10 58.175,79.325 58.846,78.654 59.054,78.654 61,80.6 61.1,80.6 v1(61.8,81.3) ; R11.1 61.3,87.4 64.6,87.4 64.8,87.2 64.8,84.5 v1(63.7,83.4)
  Bottom Layer w0.25: v1(61.8,81.3) 61.8,81.4 63.7,83.3 v1(63.7,83.4)
NetD7_12: D7.12 R14.1 | length 14.5
  Top Layer w0.25: R14.1 48,86.5 v1(48.8,85.7) ; D7.12 55.618,80.742 55.618,81.909 56.108,82.4 v1(57.1,82.4)
  Bottom Layer w0.25: v1(48.8,85.7) 50.4,84.1 55.4,84.1 v1(57.1,82.4)
NetD8_3: D8.3 D8.4 D8.5 | length 2.5
  Top Layer w0.25: D8.5 D8.4 D8.3
NetD8_8: D8.8 D8.12 D8.13 R15.2 | length 25.1
  Top Layer w0.25: v1(70.9,90.3) 70.915,90.285 73.71,90.285 D8.12 D8.13 73.745,91.52 75.68,91.52 v1(75.7,91.5) ; v1(71.5,86.9) 71.5,86.389 72.699,85.19 D8.8 ; R15.2 75.6,101 v1(76.7,99.9)
  Bottom Layer w0.25: v1(70.9,90.3) 70.9,88.147 71.5,87.547 v1(71.5,86.9) ; v1(75.7,91.5) 75.7,98.9 v1(76.7,99.9)
NetD9_6: D9.6 D9.9 | length 13.3
  Top Layer w0.25: D9.6 83.4,87.095 84.6,88.295 v1(84.6,88.7) ; v1(86.2,84.9) 86.349,84.9 86.694,84.555 D9.9
  Bottom Layer w0.25: v1(84.6,88.7) 84.6,86.5 v1(86.2,84.9)
NetR9_2: R9.2 VD1.A | length 15.6
  Top Layer w0.25: VD1.A 39.46,60.46 47.675,68.675 47.675,68.7 47.975,69 R9.2
NetR10_2: R10.2 VD2.A | length 13.4
  Top Layer w0.25: VD2.A 49.73,64.405 53.975,68.65 R10.2
NetR11_2: R11.2 VD3.A | length 9.2
  Top Layer w0.25: VD3.A 60.46,89.515 60.975,89 R11.2
NetR12_2: R12.2 VD4.A | length 15.5
  Top Layer w0.25: VD4.A 59.73,64.83 62,67.1 62,69.1 61.854,69.246 61.646,69.246 60.7,68.3 R12.2
NetR13_2: R13.2 VD5.A | length 10.7
  Top Layer w0.25: VD5.A 50.73,91.895 53.975,88.65 R13.2
NetR14_2: R14.2 VD6.A | length 12.4
  Top Layer w0.25: VD6.A 40.73,95.895 47.975,88.65 R14.2
NetR16_2: R16.2 VD7.C | length 5
  Top Layer w0.25: VD7.C 31.84,99.3 R16.2
ON/OFF: D8.2 XP2.1 | length 57.2
  Top Layer w0.25: XP2.1 24.08,78 27.3,78 29,76.3 v1(29.1,76.3) ; v1(31.5,77.4) 34.3,80.2 45.4,80.2 49.9,84.7 51.6,86.4 v1(63.2,86.4) ; v1(64.7,90) 64.7,91.7 64.86,91.54 D8.2
  Bottom Layer w0.25: v1(29.1,76.3) 30.4,76.3 v1(31.5,77.4) ; v1(63.2,86.4) 64.7,87.9 v1(64.7,90)
Out1_N: D2.6 XP1.2 | length 31.2
  Top Layer w0.3: D2.6 108.905,103.85 108.755,103.7 108.746,103.7 108.57,103.524 108.57,103.2 116.154,95.616 122.022,95.616 130.03,87.609 130.03,86.78 130.65,86.16 XP1.2
Out1_P: D2.5 XP1.1 | length 31
  Top Layer w0.3: D2.5 107.635,103.85 107.785,103.7 107.794,103.7 107.97,103.524 107.97,102.951 115.905,95.016 121.774,95.016 129.43,87.36 129.43,87.036 129.254,86.86 129.16,86.86 XP1.1
Out2_N: D5.6 XP1.10 | length 31.4
  Top Layer w0.3: D5.6 112.45,83.505 112.942,83.997 113.901,83.997 114.703,84.8 v1(114.8,84.8) ; v1(116.1,73.9) 116.196,73.996 116.521,73.996 116.526,74 129.147,74 130.03,74.883 130.03,75.38 130.65,76 XP1.10
  Bottom Layer w0.3: v1(114.8,84.8) 114.896,84.704 114.896,84.379 114.9,84.374 114.9,82.081 115,81.981 115,79.769 114.574,79.343 114.574,74.94 115.519,73.996 116.004,73.996 v1(116.1,73.9)
Out2_P: D5.5 XP1.9 | length 30.9
  Top Layer w0.3: D5.5 112.45,82.235 113.376,83.161 113.376,83.397 114.246,83.397 115.6,84.751 v1(115.6,84.8) ; v1(116.1,74.7) 116.196,74.604 116.521,74.604 116.526,74.6 128.898,74.6 129.43,75.132 129.43,75.38 128.81,76 XP1.9
  Bottom Layer w0.3: v1(115.6,84.8) 115.504,84.704 115.504,84.379 115.5,84.374 115.5,82.33 115.6,82.23 115.6,79.52 115.174,79.095 115.174,75.188 115.567,74.796 116.004,74.796 v1(116.1,74.7)
Reset: D4.15 D7.15 D9.7 D9.15 XP2.2 | length 119.8
  Top Layer w0.25: XP2.2 20.96,73.5 21.8,73.5 v1(23.3,75) ; v1(30,78.7) 33,81.7 v1(39.2,81.7) ; v1(40.6,85.4) 42,84 48,84 v1(50.3,86.3) ; v1(51.8,84.8) 51.2,84.2 51.2,81.35 D7.15 51.825,83.7 61.2,83.7 69,75.9 74.4,75.9 78.2,79.7 v1(78.375,79.7) 78.375,80.225 78.3,80.3 78.3,85.6 78.525,85.825 D9.7 82.725,85.825 89.075,92.175 D9.15 ; v1(77.9,74.8) 77.948,74.752 77.948,74.252 80.4,71.8 80.4,70.8 80.5,70.7 81.1,70.7 81.3,70.5 v1(81.3,68.7) ; v1(84.2,67.4) 84.212,67.412 84.212,69.412 D4.15
  Bottom Layer w0.25: v1(23.3,75) 23.4,75.1 23.4,75.3 24.3,76.2 27.554,76.2 29.2,77.846 29.2,78.2 29.404,78.2 29.904,78.7 v1(30,78.7) ; v1(39.2,81.7) 39.2,84 v1(40.6,85.4) ; v1(50.3,86.3) v1(51.8,84.8) ; v1(77.9,74.8) 78.375,75.275 v1(78.375,79.7) ; v1(81.3,68.7) 82.6,67.4 v1(84.2,67.4)
S0: D2.11 D9.3 | length 42.3
  Top Layer w0.25: D9.3 81.656,90.905 81.851,91.1 v1(82.2,91.1) ; v1(99.5,107.4) 100.1,106.8 101.2,106.8 102.2,107.8 107.2,107.8 107.205,107.795 107.4,107.795 108.905,109.3 D2.11
  Bottom Layer w0.25: v1(82.2,91.1) 82.2,96.4 82.5,96.7 84.8,96.7 84.8,100.2 92,107.4 v1(99.5,107.4)
S1: D2.10 D9.4 | length 77.2
  Top Layer w0.25: v1(78.7,88.7) 78.805,88.805 78.96,88.805 79.79,89.635 D9.4 ; v1(110,107.9) 110,109.55 D2.10 D2.10@110.175,109.175
  Bottom Layer w0.25: v1(78.7,88.7) 79.9,87.5 79.9,82.5 80.8,81.6 81.9,81.6 82.4,82.1 88.154,82.1 88.3,82.246 88.3,93.2 91.6,96.5 92.8,96.5 96.2,93.1 107.5,93.1 116.8,102.4 116.8,102.854 116.654,103 112.2,103 110,105.2 v1(110,107.9)
S2: D2.9 D9.5 | length 55.3
  Top Layer w0.25: D9.5 82.465,88.365 87.4,93.3 v1(87.4,98.5) ; D2.9 111.445,110.125 111.62,110.3 114.654,110.3 114.8,110.154 v1(114.8,101.9)
  Bottom Layer w0.25: v1(87.4,98.5) 111.4,98.5 v1(114.8,101.9)
S3: D5.11 D9.11 | length 20.7
  Top Layer w0.25: D9.11 89.695,87.1 v1(92.1,87.1) ; v1(94.8,82.5) 94.8,82.4 95.1,82.1 99.3,82.1 100.705,83.505 D5.11
  Bottom Layer w0.25: v1(92.1,87.1) 92.1,86.2 94.8,83.5 v1(94.8,82.5)
S4: D5.10 D9.12 | length 20.9
  Top Layer w0.25: D9.12 89.825,88.5 v1(92,88.5) ; v1(95.3,84.4) 95.3,84.258 96.658,82.9 98.7,82.9 100.575,84.775 D5.10
  Bottom Layer w0.25: v1(92,88.5) 92.8,87.7 92.8,86.4 94.8,84.4 v1(95.3,84.4)
S5: D5.9 D9.13 | length 18.4
  Top Layer w0.25: D9.13 89.722,89.667 92.167,89.667 v1(92.2,89.7) ; v1(96.2,88.9) 99.055,86.045 D5.9
  Bottom Layer w0.25: v1(92.2,89.7) 95.4,89.7 v1(96.2,88.9)
STROB0: D1.1 D4.3 | length 50.5
  Top Layer w0.25: D4.3 85.349,64.121 85.349,65.075 85.2,65.224 85.2,65.754 85.346,65.9 v1(87.1,65.9) ; v1(93.5,74.1) 93.5,73.358 100.258,66.6 111.5,66.6 v1(111.6,66.5) ; v1(114,63.7) 113.851,63.7 113.451,63.3 v1(112.2,63.3) 117.096,58.404 117.758,58.404 117.92,58.242 D1.1
  Bottom Layer w0.25: v1@87.402,65.9 v1(87.1,65.9) 87.1,66.9 93.5,73.3 v1(93.5,74.1) ; v1(111.6,66.5) 111.705,66.395 111.705,65.995 v1(114,63.7)
STROB1: D4.2 D6.5 | length 15.9
  Top Layer w0.25: v1(73.4,61.3) 74.205,62.105 74.205,63.245 D6.5 ; v1(83.1,65.6) 83.1,65.525 84.225,64.4 D4.2
  Bottom Layer w0.25: v1(73.4,61.3) 77.2,61.3 81.5,65.6 v1(83.1,65.6)
STROB2: D1.10 D4.4 | length 50
  Top Layer w0.25: D4.4 86.765,62.084 87.1,61.749 v1(87.1,61.6) ; v1(112.9,55.4) 113.5,54.8 122.3,54.8 123.6,56.1 123.6,62.425 123,63.025 D1.10
  Bottom Layer w0.25: v1(87.1,61.6) 93.3,55.4 v1(112.9,55.4)
STROB3: D3.12 D4.7 | length 21.6
  Top Layer w0.25: v1(89.9,62.4) 90.587,63.087 90.587,63.962 D4.7 ; v1(93.6,60.2) 93.6,62 94.8,63.2 94.8,63.8 95.6,63.8 v1(96.7,64.9) ; v1(102.6,62.3) 102.305,62.595 102.305,62.84 102.73,63.265 D3.12
  Bottom Layer w0.25: v1(89.9,62.4) 92.1,60.2 v1(93.6,60.2) ; v1(96.7,64.9) 99.3,62.3 v1(102.6,62.3)
STROB4: D3.1 D4.10 | length 23.7
  Top Layer w0.25: v1(90.5,67.8) 90.537,67.837 90.537,69.387 D4.10 ; v1(92.7,57.8) v1(95,60.1) ; v1(98.6,57.4) 99.175,57.975 100.028,57.975 100.19,58.137 D3.1
  Bottom Layer w0.25: v1(90.5,67.8) 92.5,67.8 92.9,67.4 92.9,62.2 v1(95,60.1) ; v1(92.7,57.8) 92.9,57.8 93.3,57.4 v1(98.6,57.4)
STROB5: D1.4 D4.1 | length 70.2
  Top Layer w0.25: v1(79.2,61.6) 79.2,59.7 91.6,47.3 122.5,47.3 125.3,50.1 v1(125.3,53.9) ; v1(82.6,62.3) 82.6,62.449 82.955,62.804 D4.1 ; v1(121.7,55.8) 121.715,55.815 121.715,57.985 D1.4
  Bottom Layer w0.25: v1(79.2,61.6) 81.9,61.6 v1(82.6,62.3) ; v1(121.7,55.8) 123.6,53.9 v1(125.3,53.9)
STROB6: D1.12 D4.5 | length 39.2
  Top Layer w0.25: D4.5 88.035,65.935 88.4,66.3 v1(94.9,66.3) ; v1(98.6,69.2) 100.5,67.3 118.5,67.3 120.46,65.34 D1.12
  Bottom Layer w0.25: v1(94.9,66.3) 95.7,66.3 v1(98.6,69.2)
STROB7: D4.6 D6.9 | length 22
  Top Layer w0.25: D6.9 75.48,69.854 75.626,70 78.254,70 79.9,68.354 v1(79.9,63.1) ; v1(87.9,62.6) 88.005,62.705 88.46,62.705 89.305,63.55 D4.6
  Bottom Layer w0.25: v1(79.9,63.1) 82.9,63.1 83.4,62.6 v1(87.9,62.6)
pads on no net: D4.9 D4.11 D7.1 D7.2 D7.6 D7.7 D7.11 XP2.4 XP2.5 XP2.6

## Silkscreen, mask and mechanical layers (free items; w line width, h text height)
Mechanical 5:
  text "CA010M0010REB-0405" at 109,101 h1.52